# Altium PCB Ser_plytka.pcbdoc
Units mm, origin at the board's own origin, x right, y up, seen from the top; angles counter-clockwise.
Board outline 91 x 25 mm, 2 copper layers (Top Layer, Bottom Layer); 99 components, 82 nets, 372 pads, 273 vias.
Unrouted connection lines stored in the file: 66.
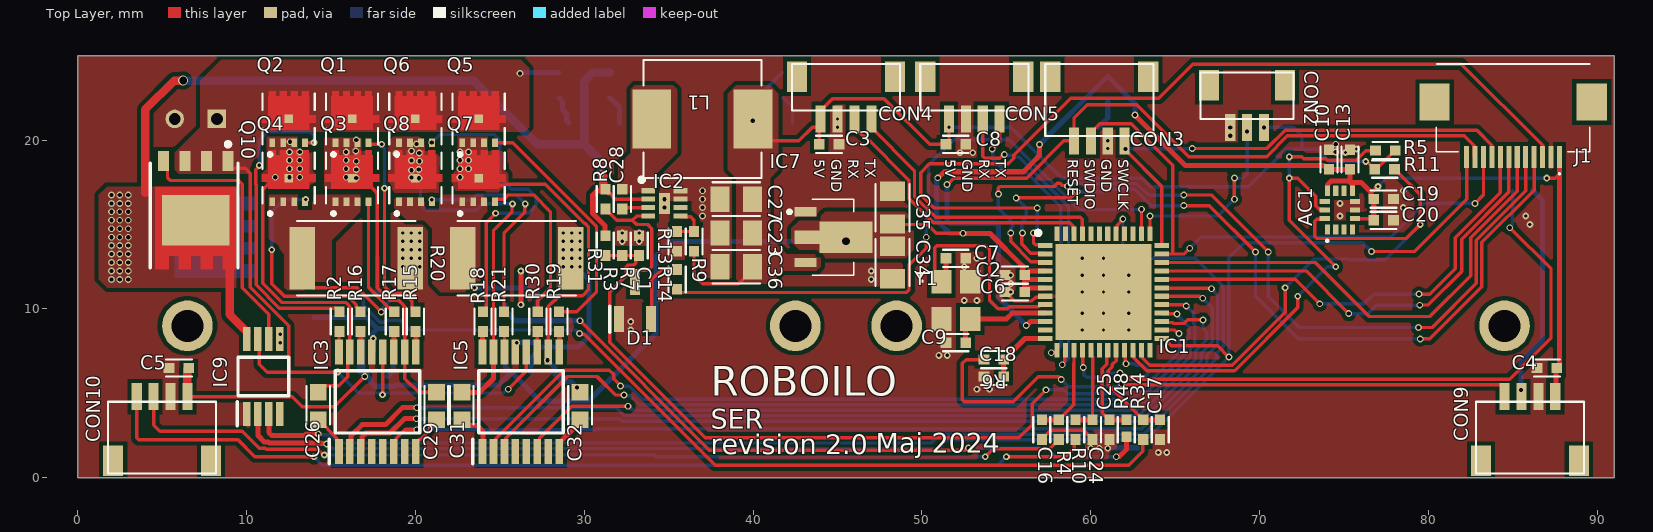
[diagram p0: Top Layer view]
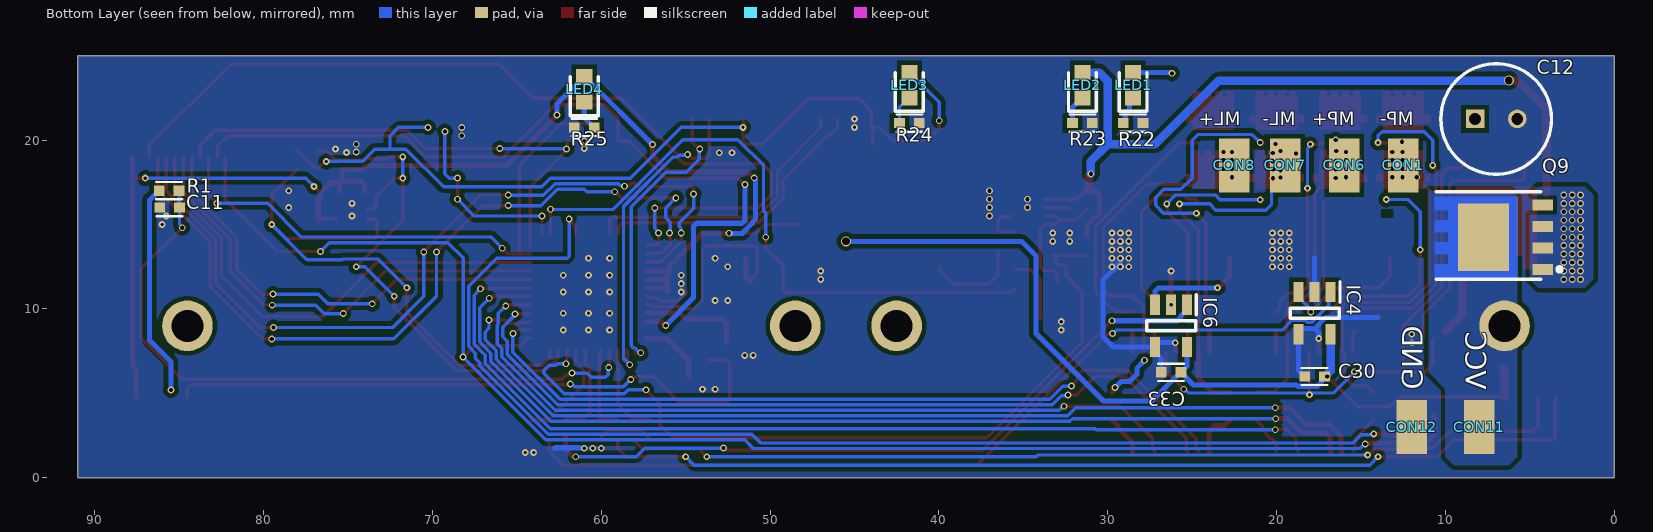
[diagram p1: Bottom Layer view, seen from below]
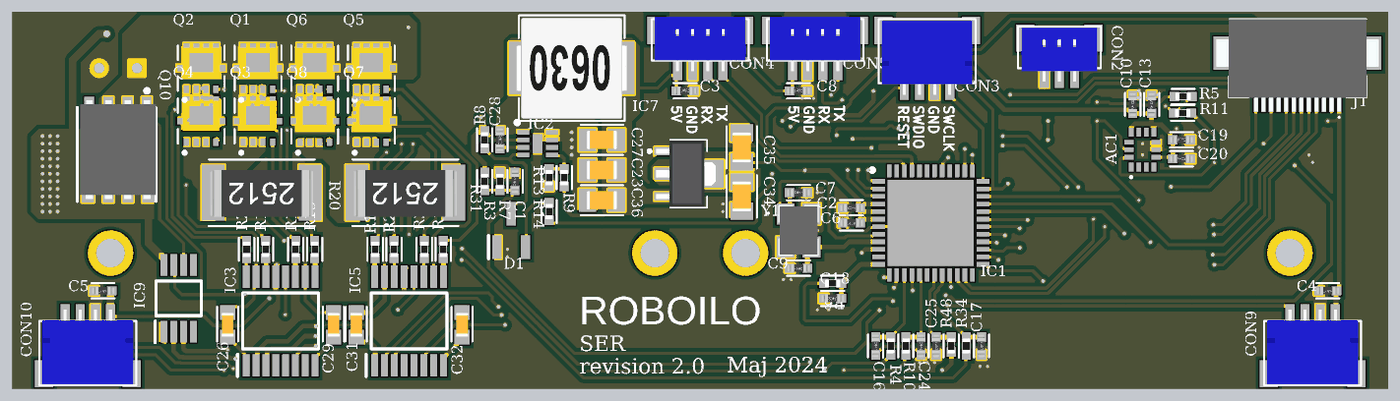
[diagram p2: 3D render of the assembled board from above, using the file's embedded part models]
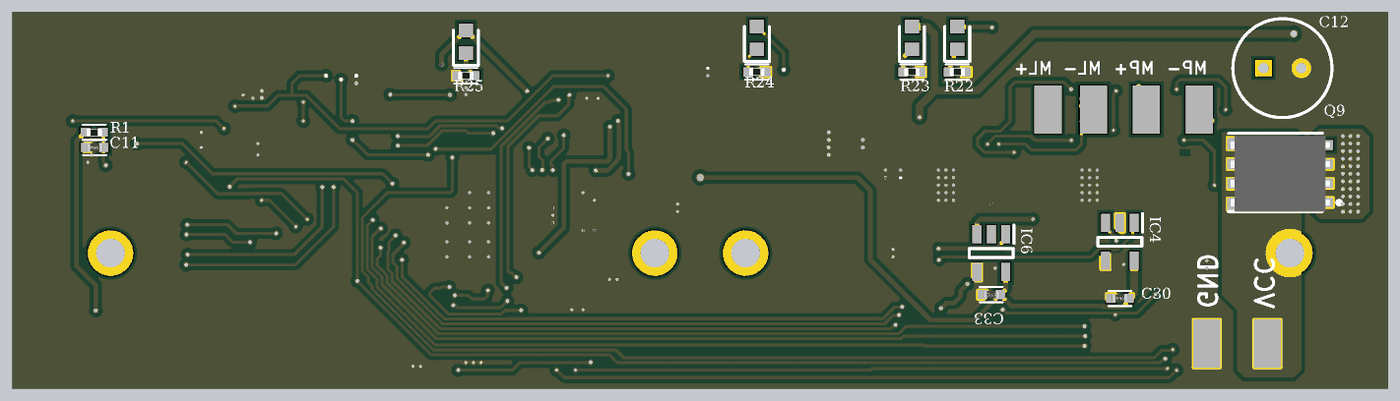
[diagram p3: 3D render of the assembled board from below, using the file's embedded part models]

## Layer stack, top to bottom
Top Solder: solder mask 0.0102, Solder Resist, Dk 3.5
Top Layer: signal copper 0.0356
Dielectric 1: dielectric 0.32, FR-4, Dk 4.8
Bottom Layer: signal copper 0.0356
Bottom Solder: solder mask 0.0102, Solder Resist, Dk 3.5

## Board outline
0,0 91,0 91,25 0,25

## Design rules (kind name [scope] priority, off if disabled: settings)
Clearance [All] p1: gap=0.254 ignorepadtopadclearanceinfootprint=TRUE except(0.127: Arc-Arc Arc-Track Arc-SMDPad Arc-Via Arc-Text Track-Track Track-SMDPad Track-Via Track-Text SMDPad-SMDPad SMDPad-Via SMDPad-Text THPad-Via THPad-Text Via-Via Via-Text Fill-Text Poly-Text Region-Text Text-Text; 0.2: Arc-THPad Track-THPad SMDPad-THPad; 0.5: THPad-THPad)
HoleSize [All] p1: absolutevalues=TRUE maxlimit=2.54 minlimit=0.02 maxpercent=80.000 minpercent=20.000
HoleToHoleClearance [All] p1: gap=0.127 allowstackedmicrovias=TRUE
PlaneClearance [All] p1: clearance=0.3
PlaneConnect PlaneConnect_1 [(HasFootprint('R 2512'))] p1: planeconnectstyle=Relief reliefexpansion=0.508 reliefentries=4 reliefconductorwidth=0.254 reliefairgap=0.254
PlaneConnect [All] p2: planeconnectstyle=Relief reliefexpansion=0.508 reliefentries=4 reliefconductorwidth=0.254 reliefairgap=0.254
PolygonConnect "Polygon Power Connection" [(HasFootprint('DFN 5x6')) OR (HasFootprint('R 2512')) OR IsVia OR HasFootprint('SMD PAD')] p1: connectstyle=Direct reliefconductorwidth=0.254 reliefentries=4 polygonreliefangle="90 Angle" airgapwidth=0.254 // Conection to high power components
PolygonConnect [All] p2: connectstyle=Direct reliefconductorwidth=0.254 reliefentries=4 polygonreliefangle="90 Angle" airgapwidth=0.254
RoutingVias [All] p1: holewidth=0.3 width=0.5 viastyle="Through Hole" minholewidth=0.2 minwidth=0.3 maxholewidth=1 maxwidth=1.27
SilkToSilkClearance [All] p1: silktosilkclearance=0.127
SolderMaskExpansion TentedVias [IsVia] p1: expansion=0.102 istentingtop=TRUE
SolderMaskExpansion [All] p2: expansion=0.102 istentingtop=FALSE
Width [All] p1: maxlimit=0.508 minlimit=0.127 preferedwidth=0.3
25 further rules are at their usual default settings.

## Classes and differential pairs
component class MCU-and-ICs: AC1 C1 C2 C6 C7 C9 C10 C13 C19 C20 C23 C27 C28 CON2 CON3 D1 IC1 IC2 J1 L1 R3 R5 R7 R8 R9 R11 R13 R14 Y1
component class Interface1: +12 C12 C34 C35 C36 CON11 CON12 GND IC7 IC9 LED1 LED2 LED3 LED4 Q9 Q10 R22 R23 R24 R25
component class Connectors-and-Filters: C3 C4 C5 C8 C11 C16 C17 C18 C24 C25 CON4 CON5 CON9 CON10 R1 R4 R6 R10 R34 R48
component class Channel-B2: C31 C32 C33 CON7 CON8 IC5 IC6 Q5 Q6 Q7 Q8 R18 R19 R21 R30 R31 V1B
component class Channel-A2: AHS C26 C29 C30 CON1 CON6 IC3 IC4 Q1 Q2 Q3 Q4 R2 R15 R16 R17 R20 V1A

## Components (designator, comment, footprint, x,y, rotation, side; value= is the part's Value field where it differs from the comment)
AC1 "LSM6DSOXTR" LGA-14_1 74.75,15.85 r90 top
C1 "1uF" "C 0402" 33.25,13.75 r90 top
C2 "1uF" "C 0402" 55.5,12 r180 top
C3 "100nF" "C 0402" 44.5,19.75 r0 top
C4 "100nF" "C 0402" 87,6.5 r180 top
C5 "100nF" "C 0402" 6,6.5 r180 top
C6 "100nF" "C 0402" 55.5,11 r180 top
C7 "22pF" "C 0402" 52,13 r0 top
C8 "100nF" "C 0402" 52,19.75 r0 top
C9 "22pF" "C 0402" 52,8 r180 top
C10 "100nF" "C 0402" 74.1,18.85 r90 top
C11 "22nF" "C 0402" 85.55,16 r0 bottom
C12 "UVY1V101MED1TD" CAPPRD250W50D655H1250 8.25,21.25 r180 bottom
C13 "1uF" "C 0402" 75.35,18.85 r90 top
C16 "22nF" "C 0402" 57.1,2.847 r270 top
C17 "22nF" "C 0402" 64.1,2.847 r270 top
C18 "22nF" "C 0402" 54.25,6 r180 top
C19 "1uF" "C 0402" 77.334,16.5 r0 top
C20 "100nF" "C 0402" 77.334,15.25 r0 top
C23 "22uF" "C 0805" 39,14.5 r180 top
C24 "22nF" "C 0402" 60.1,2.847 r270 top
C25 "22nF" "C 0402" 61.1,2.847 r270 top
C26 "1uF" "C 0603" 14.25,4.25 r90 top
C27 "22uF" "C 0805" 39,16.5 r180 top
C28 "100nF" "C 0402" 32.25,16.5 r270 top
C29 "1uF" "C 0603" 21.25,4.25 r90 top
C30 "100nF" "C 0402" 17.75,6 r0 bottom
C31 "1uF" "C 0603" 22.75,4.25 r90 top
C32 "1uF" "C 0603" 29.75,4.25 r90 top
C33 "100nF" "C 0402" 26.25,6.25 r0 bottom
C34 "10uF" "C 0805" 48.25,12.75 r270 top
C35 "10uF" "C 0805" 48.25,16 r90 top
C36 "10uF" "C 0805" 39,12.5 r180 top
CON1 "1 Pin" "SMD PAD" 12.5,18.5 r180 bottom
CON2 "3 Pin" BM03B-SRSS-TB 69.25,22.25 r0 top
CON3 "4 PIN" SM04B-SRSS-TB 60.5,22.75 r0 top
CON4 "4 PIN" BM04B-SRSS-TB 45.5,22.75 r0 top
CON5 "4 PIN" BM04B-SRSS-TB 53.1,22.75 r0 top
CON6 "1 Pin" "SMD PAD" 16,18.5 r0 bottom
CON7 "1 Pin" "SMD PAD" 19.5,18.5 r0 bottom
CON8 "1 Pin" "SMD PAD" 22.5,18.5 r0 bottom
CON9 "4 PIN" SM04B-SRSS-TB 86,2.002 r180 top
CON10 "4 PIN" SM04B-SRSS-TB 5,2.002 r180 top
CON11 "Battery" "SMD PAD" 8,3 r180 bottom
CON12 "GND" "SMD PAD" 12,3 r180 bottom
D1 "P0102AL_5AA4" SOT95P255X140-3N 33,10.5 r90 top
IC1 "STM32G061C6U6" QFN50P700X700X65-49N-D 60.75,11 r0 top
IC2 "RT7251AZQW" SON50P200X200X80-9N-D 34.75,16.25 r0 top
IC3 "MIC4606-2YTS-TR" SOP65P640X120-16N 17.75,4.5 r90 top
IC4 "INA180A2IDBVR" SOT95P280X145-5N 17.75,9.75 r270 bottom
IC5 "MIC4606-2YTS-TR" SOP65P640X120-16N 26.25,4.5 r90 top
IC6 "INA180A2IDBVR" SOT95P280X145-5N 26.25,9 r270 bottom
IC7 "AZ1117CR-3.3TRG1" AZ1117CR33TRG1 45.95,14.25 r270 top
IC9 "MAX1614EUA+" SOP65P490X110-8N 11,6 r90 top
J1 "XF3M-1215-1B" XF3M12151B 85,21.75 r180 top
L1 "22uH" HPI0630 37,21.25 r180 top
LED1 "Green" LEDC1608X50N 28.5,23.25 r90 bottom
LED2 "RED" LEDC1608X50N 31.5,23.25 r90 bottom
LED3 "Green" LEDC1608X50N 41.75,23.25 r90 bottom
LED4 "Green" LEDC1608X50N 61,23 r90 bottom
Q1 "Model?" "DFN 3X3" 16.25,21.25 r90 top
Q2 "Model?" "DFN 3X3" 12.5,21.25 r90 top
Q3 "Model?" "DFN 3X3" 16.25,17.75 r90 top
Q4 "Model?" "DFN 3X3" 12.5,17.75 r90 top
Q5 "Model?" "DFN 3X3" 23.75,21.25 r90 top
Q6 "Model?" "DFN 3X3" 20,21.25 r90 top
Q7 "Model?" "DFN 3X3" 23.75,17.75 r90 top
Q8 "Model?" "DFN 3X3" 20,17.75 r90 top
Q9 "AON6403" "DFN 5x6" 7.15,14.25 r90 bottom
Q10 "Model?" "DFN 5x6" 7,15.85 r180 top
R1 "8k" "R 0402"#1 85.584,17 r0 bottom
R2 "2.2R" "R 0402"#1 15.5,9.25 r90 top
R3 "47k" "R 0402"#1 31.25,13.75 r90 top
R4 "8k" "R 0402"#1 58.1,2.847 r270 top
R5 "3k" "R 0402"#1 77.434,19.375 r0 top
R6 "8k" "R 0402"#1 54.25,7 r180 top
R7 "13k" "R 0402"#1 32.25,13.75 r270 top
R8 "63k" "R 0402"#1 31.25,16.5 r90 top
R9 "120k" "R 0402"#1 36.5,14 r270 top
R10 "8k" "R 0402"#1 59.1,2.847 r270 top
R11 "3k" "R 0402"#1 77.4,18.275 r180 top
R13 "22k" "R 0402"#1 35.5,14 r90 top
R14 "1k" "R 0402"#1 35.5,11.75 r270 top
R15 "2.2R" "R 0402"#1 20,9.25 r90 top
R16 "2.2R" "R 0402"#1 16.75,9.25 r90 top
R17 "2.2R" "R 0402"#1 18.75,9.25 r90 top
R18 "2.2R" "R 0402"#1 24,9.25 r90 top
R19 "2.2R" "R 0402"#1 28.5,9.25 r90 top
R20 "20mR" "R 2512" 16.5,13 r180 top
R21 "2.2R" "R 0402"#1 25.25,9.25 r90 top
R22 "2k" "R 0402"#1 28.5,21 r180 bottom
R23 "2k" "R 0402"#1 31.5,21 r180 bottom
R24 "500R" "R 0402"#1 41.75,21 r180 bottom
R25 "160R" "R 0402"#1 61,20.75 r0 bottom
R30 "2.2R" "R 0402"#1 27.25,9.25 r90 top
R31 "20mR" "R 2512" 26,13 r180 top
R34 "8k" "R 0402"#1 63.1,2.847 r270 top
R48 "8k" "R 0402"#2 62.1,2.847 r270 top
Y1 "MCSJK-7U-16.00-12-30-80-B-30" MCSJK7U1600123080B30 52,10.5 r270 top

## Footprints (in the part's own frame and the unit in brackets; to place one, negate y for a bottom-side part, rotate by r counter-clockwise, add the part's x,y. Pads: shape width x height; smd on the part's side, far side on the other; paste and mask are expansions set on the pad)
AZ1117CR33TRG1 [mm]
  rect 0.55x1.3 smd: 1(-1.5,-2.838) 3(1.5,-2.838)
  rect 0.8x1.475 smd: 2(0,-2.75)
  rect 1.85x3.125 smd: 4(0,-0.45)
  silkscreen extent -2.25,-3.9 2.25,0, body extent -2.2,-3.37 2.2,0.58, height 1.4
BM03B-SRSS-TB [mm]
  rect 0.6x1.6 smd: 1(-1,-1.5) 2(0,-1.5) 3(1,-1.5)
  rect 1.2x1.8 smd: A(-2.25,1) B(2.25,1)
  silkscreen extent -2.75,-1 2.75,1.75, body extent -2.5,-1.9 2.5,1.7, height 4.25
BM04B-SRSS-TB [mm]
  rect 0.6x1.6 smd: 1(-1.5,-1.5) 2(-0.5,-1.5) 3(0.5,-1.5) 4(1.5,-1.5)
  rect 1.2x1.8 smd: A(-2.9,1) B(2.9,1)
  silkscreen extent -3.2,-1 3.2,1.75, body extent -3,-1.7 3,1.9, height 4.25
"C 0402" [mm] "MLCC Capacitor 0402"
  rect 0.635x0.6 smd: 1(-0.584,0) 2(0.584,0)
  silkscreen extent -0.76,-0.51 0.76,0.51, body extent -0.76,-0.25 0.74,0.25, height 0.35
"C 0603" [mil]
  rect 38x39.37 smd: 1(-32,0) 2(32,0)
  silkscreen extent -43,-28 47,28, body extent -31,-16 31,16, height 24
"C 0805" [mil]
  rect 45x59.06 smd: 1(-38,0) 2(38,0)
  silkscreen extent -55,-39 55,39, body extent -39,-25 39,25, height 49
CAPPRD250W50D655H1250 [mm]
  rect 1.1x1.1 hole 0.7: 1(0,0)
  round 1.1 hole 0.7: 2(2.5,0)
  silkscreen extent -2.02,-3.27 4.52,3.27, body extent -2.15,-3.4 4.65,3.4, height 12.5
"DFN 3X3" [mm] "AON 7xxx Series Mosfets"
  rect 0.5x0.35 smd: 1(-1.4,0.975) 2(-1.4,0.325) 3(-1.4,-0.325) 4(-1.4,-0.975)
  rect 0.5x0.5 smd paste-1 mask+0: 5_8(0,0)
  Top Layer region: 0.215,1.225 1.35,1.225 1.35,1.175 1.65,1.175 1.65,0.775 1.35,0.775 1.35,0.525 1.65,0.525 1.65,0.125 1.35,0.125 1.35,-0.125 1.65,-0.125 1.65,-0.525 1.35,-0.525 1.35,-0.775 1.65,-0.775 1.65,-1.175 1.35,-1.175 1.35,-1.225 0.215,-1.225 0.215,-1.605 -0.215,-1.605 -0.215,-1.225 -0.63,-1.225 -0.63,1.225 -0.215,1.225 -0.215,1.605 0.215,1.605
  silkscreen extent -2.2,-1.55 1.5,1.55
"DFN 5x6" [mm] "PowerMOSFET"
  rect 0.65x1.2 smd: 1(-1.905,-2.91) 2(-0.635,-2.91) 3(0.635,-2.91) 4(1.905,-2.91)
  rect 4x3 smd: 5_8(0,0.6)
  Top Layer region: -2.4,-1.4 -2.4,3.5 -1.6,3.5 -1.6,2.7 -1,2.7 -1,3.5 -0.3,3.5 -0.3,2.7 0.3,2.7 0.3,3.5 1,3.5 1,2.7 1.6,2.7 1.6,3.5 2.4,3.5 2.4,-1.4
  silkscreen extent -2.5,-4.02 2.7,3.42, body extent -2.5,-3.27 2.5,3.26, height 1.2
HPI0630 [mm] "Power Inductor"
  rect 2.3x3.5 smd: 1(-3,0) 2(3,0)
  silkscreen extent -3.5,-3.5 3.5,3.5, body extent -3.65,-3.35 3.65,3.35, height 2.81
LEDC1608X50N [mm]
  rect 0.9x0.95 smd: 1(-0.75,0) 2(0.75,0)
  silkscreen extent -1.55,-0.82 0.75,0.82, body extent -0.8,-0.4 0.8,0.4, height 0.4
LGA-14_1 [mm]
  rect 0.6x0.3 smd: 1(-1.15,0.75) 2(-1.15,0.25) 3(-1.15,-0.25) 4(-1.15,-0.75) 8(1.15,-0.75) 9(1.15,-0.25) 10(1.15,0.25) 11(1.15,0.75)
  rect 0.3x0.6 smd: 5(-0.5,-0.9) 6(0,-0.9) 7(0.5,-0.9) 12(0.5,0.9) 13(0,0.9) 14(-0.5,0.9)
  silkscreen extent -1.83,0.74 -1.8,0.77, body extent -1.62,-1.25 1.38,1.25, height 0.86
MCSJK7U1600123080B30 [mm]
  rect 1.4x1.2 smd: 1(-1.1,-0.85) 2(1.1,-0.85) 3(1.1,0.85) 4(-1.1,0.85)
  silkscreen extent -1.2,-2.05 -1.1,-1.95, body extent -1.68,-1.33 1.68,1.33, height 0.9
QFN50P700X700X65-49N-D [mm]
  rect 0.85x0.3 smd: 1(-3.45,2.75) 2(-3.45,2.25) 3(-3.45,1.75) 4(-3.45,1.25) 5(-3.45,0.75) 6(-3.45,0.25) 7(-3.45,-0.25) 8(-3.45,-0.75) 9(-3.45,-1.25) 10(-3.45,-1.75) 11(-3.45,-2.25) 12(-3.45,-2.75) 25(3.45,-2.75) 26(3.45,-2.25) 27(3.45,-1.75) 28(3.45,-1.25) 29(3.45,-0.75) 30(3.45,-0.25) 31(3.45,0.25) 32(3.45,0.75) 33(3.45,1.25) 34(3.45,1.75) 35(3.45,2.25) 36(3.45,2.75)
  rect 0.3x0.85 smd: 13(-2.75,-3.45) 14(-2.25,-3.45) 15(-1.75,-3.45) 16(-1.25,-3.45) 17(-0.75,-3.45) 18(-0.25,-3.45) 19(0.25,-3.45) 20(0.75,-3.45) 21(1.25,-3.45) 22(1.75,-3.45) 23(2.25,-3.45) 24(2.75,-3.45) 37(2.75,3.45) 38(2.25,3.45) 39(1.75,3.45) 40(1.25,3.45) 41(0.75,3.45) 42(0.25,3.45) 43(-0.25,3.45) 44(-0.75,3.45) 45(-1.25,3.45) 46(-1.75,3.45) 47(-2.25,3.45) 48(-2.75,3.45)
  rect 5.7x5.7 smd: 49(0,0)
  silkscreen extent -4,3.38 -3.75,3.62, body extent -3.55,-3.55 3.55,3.55, height 0.65
"R 0402"#1 [mm] "0402 resistor Chip"
  rect 0.635x0.6 smd: 1(-0.584,0) 2(0.584,0)
  silkscreen extent -0.76,-0.51 0.76,0.51, body extent -0.5,-0.25 0.5,0.25, height 0.31
"R 0402"#2 [mm] "0402 resistor Chip"
  rect 0.635x0.6 smd: 1(-0.584,0) 2(0.412,0)
  silkscreen extent -0.76,-0.51 0.76,0.51, body extent -0.5,-0.25 0.5,0.25, height 0.31
"R 2512" [mm]
  rect 1.5x3.7 smd: 1(-3.2,0) 2(3.2,0)
  silkscreen extent -3.5,-2.2 3.5,2.2, body extent -3.4,-1.5 3.4,1.6, height 0.6
SM04B-SRSS-TB [mm]
  rect 0.6x1.6 smd: 1(-1.5,-2.8) 2(-0.5,-2.8) 3(0.5,-2.8) 4(1.5,-2.8)
  rect 1.2x1.8 smd: A(-2.9,1) B(2.9,1)
  silkscreen extent -3.2,-2.5 3.2,1.75, body extent -3,-3.25 3,1.7, height 2.96
"SMD PAD" [mm]
  rect 1.8x3.2 smd: 1(0,0)
SON50P200X200X80-9N-D [mm]
  rect 0.8x0.3 smd: 1(-0.95,0.75) 2(-0.95,0.25) 3(-0.95,-0.25) 4(-0.95,-0.75) 5(0.95,-0.75) 6(0.95,-0.25) 7(0.95,0.25) 8(0.95,0.75)
  rect 0.65x1.25 smd: 9(0,0)
  silkscreen extent -1.47,1.28 -1.22,1.52, body extent -1.05,-1 1.05,1, height 0.8
SOP65P490X110-8N [mm]
  rect 1.425x0.45 smd: 1(-2.212,0.975) 2(-2.212,0.325) 3(-2.212,-0.325) 4(-2.212,-0.975) 5(2.212,-0.975) 6(2.212,-0.325) 7(2.212,0.325) 8(2.212,0.975)
  silkscreen extent -2.93,-1.5 1.15,1.55, body extent -2.45,-1.5 2.45,1.5, height 1.1
SOP65P640X120-16N [mm]
  rect 1.475x0.45 smd: 1(-2.938,2.275) 2(-2.938,1.625) 3(-2.938,0.975) 4(-2.938,0.325) 5(-2.938,-0.325) 6(-2.938,-0.975) 7(-2.938,-1.625) 8(-2.938,-2.275) 9(2.938,-2.275) 10(2.938,-1.625) 11(2.938,-0.975) 12(2.938,-0.325) 13(2.938,0.325) 14(2.938,0.975) 15(2.938,1.625) 16(2.938,2.275)
  silkscreen extent -3.67,-2.5 1.85,2.85, body extent -3.2,-2.5 3.2,2.5, height 1.2
SOT95P255X140-3N [mm]
  rect 1.55x0.6 smd: 1(-1.1,0.95) 2(-1.1,-0.95) 3(1.1,0)
  silkscreen extent -1.88,1.5 -0.33,1.5
SOT95P280X145-5N [mm]
  rect 1.2x0.6 smd: 1(-1.25,0.95) 2(-1.25,0) 3(-1.25,-0.95) 4(1.25,-0.95) 5(1.25,0.95)
  silkscreen extent -1.85,-1.45 0.3,1.5, body extent -1.4,-1.45 1.4,1.45, height 1.2
XF3M12151B [mm]
  rect 0.3x1.3 smd: 1(-2.75,2.75) 2(-2.25,2.75) 3(-1.75,2.75) 4(-1.25,2.75) 5(-0.75,2.75) 6(-0.25,2.75) 7(0.25,2.75) 8(0.75,2.75) 9(1.25,2.75) 10(1.75,2.75) 11(2.25,2.75) 12(2.75,2.75)
  rect 1.8x2.2 smd: MP1(-4.65,-0.5) MP2(4.65,-0.5)
  silkscreen extent -4.55,-2.75 4.55,3.8, body extent -5.37,-2.75 5.37,3.37, height 2.1

## Part data
AC1: "Accelerometer", Manufacturer_Name=STMicroelectronics, Mouser Part Number=511-LSM6DSOXTR, Arrow Part Number=LSM6DSOXTR, Arrow Price/Stock=https://www.arrow.com/en/products/lsm6dsoxtr/stmicroelectronics, Datasheet Link=https://www.st.com/resource/en/datasheet/lsm6dsox.pdf, Manufacturer_Part_Number=LSM6DSOXTR, Mouser Price/Stock=https://www.mouser.co.uk/ProductDetail/STMicroelectronics/LSM6DSOXTR?qs=l7cgNqFNU1i9dcjzItLpVQ%3D%3D
C1 C2 C3 C4 C5 C6 C7 C8 C9 C10 C11 C13 C16 C17 C18 C19 C20 C23 C24 C25 C26 C27 C28 C29 C30 C31 C32 C33 C34 C35 C36: library part Capacitor, "MLCC Capacitor"
C12: "Capacitor Polarised", Manufacturer_Name=Nichicon, Arrow Part Number=UVY1V101MED1TD, Arrow Price/Stock=https://www.arrow.com/en/products/uvy1v101med1td/nichicon, Datasheet Link=http://nichicon-us.com/english/products/pdfs/e-uvy.pdf, Height=12.5mm, Manufacturer_Part_Number=UVY1V101MED1TD
CON11 CON12: library part "1 Pin"
D1: "SCR", Arrow Part Number="P0102AL 5AA4", Manufacturer_Name=STMicroelectronics, Mouser Part Number=511-P0102AL, Arrow Price/Stock=https://www.arrow.com/en/products/p0102al5aa4/stmicroelectronics, Datasheet Link=https://www.st.com/resource/en/datasheet/p0102al.pdf, Height=1.4mm, Manufacturer_Part_Number="P0102AL 5AA4", Mouser Price/Stock=https://www.mouser.co.uk/ProductDetail/STMicroelectronics/P0102AL-5AA4/?qs=PjVWedEN3CRKQvFRu1Tr6Q%3D%3D
IC1: "Integrated Circuit", Manufacturer_Name=STMicroelectronics, Mouser Part Number=511-STM32G061C6U6, Datasheet Link=https://www.st.com/resource/en/datasheet/stm32g061c6.pdf, Height=0.65mm, Manufacturer_Part_Number=STM32G061C6U6, Mouser Price/Stock=https://www.mouser.co.uk/ProductDetail/STMicroelectronics/STM32G061C6U6?qs=CiayqK2gdcKUDq0OUzUqqg%3D%3D
IC2: "Integrated Circuit", Manufacturer_Name=RICHTEK, Datasheet Link=https://componentsearchengine.com/Datasheets/2/RT7251AZQW.pdf, Height=0.8mm, Manufacturer_Part_Number=RT7251AZQW
IC3 IC5: "Integrated Circuit", Manufacturer_Name=Microchip, Mouser Part Number=579-MIC4606-2YTS-TR, Arrow Part Number=MIC4606-2YTS-TR, Arrow Price/Stock=https://www.arrow.com/en/products/mic4606-2yts-tr/microchip-technology?region=nac, Datasheet Link=https://eu.mouser.com/datasheet/2/268/20005604B-1286645.pdf, Height=1.2mm, Manufacturer_Part_Number=MIC4606-2YTS-TR, Mouser Price/Stock=https://www.mouser.co.uk/ProductDetail/Microchip-Technology/MIC4606-2YTS-TR?qs=fxR7EJxuiMGiGNq6G0IdXQ%3D%3D
IC4 IC6: "Integrated Circuit", Manufacturer_Name="Texas Instruments", Mouser Part Number=595-INA180A2IDBVR, Arrow Part Number=INA180A2IDBVR, Arrow Price/Stock=https://www.arrow.com/en/products/ina180a2idbvr/texas-instruments?region=nac, Datasheet Link=http://www.ti.com/lit/ds/symlink/ina180.pdf, Height=1.45mm, Manufacturer_Part_Number=INA180A2IDBVR, Mouser Price/Stock=https://www.mouser.co.uk/ProductDetail/Texas-Instruments/INA180A2IDBVR?qs=5aG0NVq1C4wYcJfa99BoHg%3D%3D
IC7: "Integrated Circuit", Manufacturer_Name="Diodes Inc.", Mouser Part Number=621-AZ1117CR-3.3TRG1, Arrow Part Number=AZ1117CR-3.3TRG1, Arrow Price/Stock=https://www.arrow.com/en/products/az1117cr-3.3trg1/diodes-incorporated?region=nac, Datasheet Link=https://www.diodes.com/assets/Datasheets/AZ1117C.pdf, Height=2mm, Manufacturer_Part_Number=AZ1117CR-3.3TRG1, Mouser Price/Stock=https://www.mouser.co.uk/ProductDetail/Diodes-Incorporated/AZ1117CR-3.3TRG1?qs=FKu9oBikfSlEg7waHw2tMw%3D%3D
IC9: "Integrated Circuit", Manufacturer_Name="Maxim Integrated", Mouser Part Number=700-MAX1614EUA, Datasheet Link=http://datasheets.maximintegrated.com/en/ds/MAX1614.pdf, Height=1.1mm, Manufacturer_Part_Number=MAX1614EUA+, Mouser Price/Stock=https://www.mouser.co.uk/ProductDetail/Maxim-Integrated/MAX1614EUA%2b?qs=1THa7WoU59FiDBRRbRrFJA%3D%3D
J1: "Connector", Manufacturer_Name="Omron Electronics", Mouser Part Number=653-XF3M-1215-1B, Arrow Part Number=XF3M-1215-1B, Arrow Price/Stock=https://www.arrow.com/en/products/xf3m-1215-1b/omron, Datasheet Link=https://datasheet.lcsc.com/szlcsc/Omron-Electronics-XF3M-1215-1B_C231431.pdf, Height=2mm, Manufacturer_Part_Number=XF3M-1215-1B, Mouser Price/Stock=https://www.mouser.co.uk/ProductDetail/Omron-Electronics/XF3M-1215-1B?qs=1He0yLMpldAQYeSJcjbchQ%3D%3D
L1: library part Inductor, "General pourpouse inductor"
LED1 LED2 LED3 LED4: library part 150060GS55040, "LED", Manufacturer_Name="Wurth Elektronik", Mouser Part Number=710-150060GS55040, Datasheet Link=https://katalog.we-online.de/led/datasheet/150060GS55040.pdf, Height=0.5mm, Manufacturer_Part_Number=150060GS55040, Mouser Price/Stock=https://www.mouser.co.uk/ProductDetail/Wurth-Elektronik/150060GS55040?qs=fAHHVMwC%252Bbhr5Aln2oA6Nw%3D%3D
Q1 Q2 Q3 Q4 Q5 Q6 Q7 Q8 Q10: library part "Power MOSFET", "N-Mosfet DFN 5x6"
Q9: "P-Mosfet 30V 67A Rds(on) 3.1mR"
R1 R2 R3 R4 R5 R6 R7 R8 R9 R10 R11 R13 R14 R15 R16 R17 R18 R19 R20 R21 R22 R23 R24 R25 R30 R31 R34 R48: library part Resistor, "General pourpouse resistor"
Y1: "Crystal or Oscillator", Manufacturer_Name=MULTICOMP, Datasheet Link=https://www.farnell.com/datasheets/2864166.pdf, Height=0.8mm, Manufacturer_Part_Number=MCSJK-7U-16.00-12-30-80-B-30

## Free pads (board coordinates)
  round 3 hole 1.9: 2(6.5,9) 3(42.5,9) 4(84.5,9) 5(48.5,9)

## Via types
v1: diameter 0.4, hole 0.25, Top Layer to Bottom Layer, tented both sides, 155 vias
v2: diameter 0.4, hole 0.2, Top Layer to Bottom Layer, tented both sides, 116 vias
v3: diameter 0.6, hole 0.45, Top Layer to Bottom Layer, tented both sides, 2 vias

## Nets (pads, with @x,y where several pads share a name; then routed paths per layer and width w, separated by ;. In a path a pad name is that pad's centre, name@x,y a point inside that pad or via, vN(x,y) a via of type N, cw(c..) or ccw(c..) an arc to the next point about the centre after c; other vN are vias at no path point)
3.3V: AC1.5 AC1.8 AC1.11 C2.1 C4.1 C5.1 C6.1 C10.1 C13.1 C19.1 C20.1 C30.1 C33.1 C34.1 C35.1 CON9.1 CON10.1 IC1.4 IC1.5 IC1.6 IC4.5 IC6.5 IC7.2 IC7.4 J1.1 LED4.2 | length 135.7
  Top Layer w0.2: CON10.1@6.584,4.8 12.7,4.8 13.3,4.2 15.2,4.2 v1(17,6) ; C35.1 48.285,15 50.313,15 50.834,14.479 v1(52.425,14.479) ; AC1.5 76.65,15.35 C20.1 ; 76.582,16.918 76.625,16.918 76.958,17.25 v2(77,17.25) ; v2(87,17.75) 87.5,17.75 87.75,18
  Top Layer w0.3: v1(50.937,17.762) 50.964,17.762 51.328,18.126 56.005,18.126 56.8,18.921 56.8,18.932 56.95,19.082 56.95,19.725 v1(56.957,19.732) ; v1(52.425,14.479) 52.434,14.47 54.03,14.47 55.965,12.535 55.965,12.119 C2.1 ; IC1.6 56.352,11.25 56.102,11 C6.1 C2.1 ; IC1.5 56.352,11.75 C2.1@56.102,12 ; IC1.4 56.352,12.25 C2.1@56.102,12 ; v1(62.606,21.49) 65.596,18.5 73.774,18.5 73.841,18.433 73.95,18.433 74.1,18.283 C10.1 C13.1 75.35,17.498 ; AC1.11 74,17.342 74.235,17.577 75.271,17.577 75.35,17.498 ; AC1.8 75.5,17.348 75.35,17.498 ; C20.1 C19.1 76.732,16.5 76.582,16.65 76.582,16.918 76.002,17.498 75.35,17.498 ; CON9.1 87.542,4.844 87.542,6.458 C4.1 ; C4.1@87.75,6.65 87.75,18 J1.1 ; C2.1 C2.1@56.102,12
  Top Layer w0.5: CON10.1 6.5,6.433 6.567,6.5 C5.1
  Bottom Layer w0.2: v2(77,17.25) 77.5,17.75 v2(87,17.75)
  Bottom Layer w0.3: v1(17,6) C30.1@17.183,6 ; C30.1@17.092,5.908 17.275,5.908 17.333,5.85 17.333,5.676 17.586,5.423 18.766,5.423 18.843,5.5 24.916,5.5 C33.1 ; IC6.5 25.3,6.598 C33.1@25.698,6.2 ; C33.1@25.733,6.2 27.383,4.55 30.25,4.55 34.25,8.55 34.25,13.15 35.1,14 v3(45.5,14) ; v1(50.937,17.762) 50.937,17.735 50.87,17.668 50.87,15.305 51.048,15.127 51.048,15.074 51.652,14.47 52.416,14.47 v1(52.425,14.479) ; v1(56.957,19.732) 60.975,23.75 61.025,23.75 62.606,22.169 v1(62.606,21.49)
  Bottom Layer w0.5: IC4.5 16.8,6.348 C30.1@17.074,6.074
5V: C3.1 C8.1 C23.1 C27.1 C36.1 CON2.3 CON4.1 CON5.1 IC7.3 L1.1 LED3.2 R5.2 R9.2 R11.2 | length 60.2
  Top Layer w0.2: R9.2 36.5,12 37.007,11.493 39.137,11.493 39.965,12.321 C36.1 ; v1(39.975,21.15) 39.975,20.675 40.7,19.95 42.025,19.95 ; 42.026,19.949 42.699,19.949 43.517,20.767 43.8,20.767 CON4.1@44,20.967 ; C3.1 43.916,20.666 44,20.75 CON4.1@44,20.967 ; CON5.1@51.489,21 51.489,20.861 v2(51.6,20.75) ; CON5.1 v2(51.6,20.75) ; v2(76.272,18.728) 76.31,18.69 76.383,18.69 76.798,18.275 R11.2 77.016,18.475 77.101,18.475 78.001,19.375 R5.2 ; CON4.1@44,20.967 CON4.1 44,21.75 44.7,22.45 47.75,22.45 50.45,19.75 C8.1 51.6,19.934 v2(51.6,20.75)
  Bottom Layer w0.2: v1(39.975,21.15) 39.975,22.25 41.725,24 LED3.2 ; v2(51.6,20.75) 55.262,20.75 58.262,17.75 63,17.75 63.521,17.229 69.333,17.229 71.562,19.458 72.485,19.458 ; v1(70.25,20.75) 72,20.75 72.5,20.25 72.5,19.473 72.485,19.458 ; v2(76.272,18.728) 76.25,18.75 74.116,18.75 73.408,19.458 72.485,19.458
+12: IC2.2 IC9.8 LED2.2 Q9.1 Q9.2 Q9.3 Q10.5_8 R3.2 R8.2 | length 56.4
  Top Layer w0.2: R8.2@31.468,16.867 31.834,16.5 IC2.2
  Top Layer w0.3: v1@31,17.973 v1(31,18) ; R8.2@31.121,17.062 R8.2@31.183,17 ; R3.2 31.231,14.354 31.231,14.926 30.5,15.657 30.5,16.75 30.75,17 R8.2@31.183,17 ; R8.2@31.468,16.867 31.45,16.867 31.25,17.067 R8.2@31.183,17
  Top Layer w0.5: 4,16.866 4,21.8 5.725,23.525 v3(6.25,23.525) ; Q10.5_8 7.5,15.25 9,13.75 9,9.675 IC9.8@10,8.675 ; v1@31,17.973 31.121,17.852 R8.2@31.121,17.062
  Bottom Layer w0.5: v3(6.25,23.525) 23.425,23.525 27.2,19.75 29.95,19.75 ; v1(31,18) 31,18.75 30,19.75 30,23.5 30.5,24 LED2.2
  other v1: 2,11.75 2.5,11.75 3,11.75 2,12.25 2.5,12.25 3,12.25 2,12.75 2.5,12.75 3,12.75 2,13.25 2.5,13.25 3,13.25 2,13.75 2.5,13.75 3,13.75 2,14.25 2.5,14.25 3,14.25 2,14.75 2.5,14.75 3,14.75 2,15.25 2.5,15.25 3,15.25 2,15.75 2.5,15.75 3,15.75 2,16.25 2.5,16.25 3,16.25 2,16.75 2.5,16.75 3,16.75
AHB: C29.1 IC3.8 | length 2.4
  Top Layer w0.2: IC3.8 20.025,2.074 20.241,2.29 20.305,2.29 20.85,2.836 20.85,3.055 21.233,3.437 C29.1
"AHB B": C32.1 IC5.8 | length 2.4
  Top Layer w0.3: IC5.8 28.525,2.075 29.4,2.949 29.4,3.105 29.733,3.437 C32.1
AHO: IC3.9 R15.1 | length 1.2
  Top Layer w0.3: IC3.9 R15.1@20.025,8.673
"AHO B": IC5.9 R19.1 | length 1.2
  Top Layer w0.3: IC5.9 28.525,8.589 R19.1@28.551,8.615
AHS: C29.2 CON6.1 IC3.10 Q1.1 Q1.2 Q1.3 Q3.5_8 | length 14.9
  Top Layer w0.2: 17.226,17.369 17.64,16.955 17.64,16.921 17.75,16.811 17.75,11.25 18.5,10.5 19.023,10.5 19.277,10.246 19.277,10.223 19.394,10.106 19.394,8.371 19.381,8.358 19.381,7.444 IC3.10 19.375,5.875 20.187,5.063 C29.2
  other v1: 16.5,17.75 15.9,17.8 16.5,18.25 15.9,18.3 16.5,18.75 15.9,18.8 15.9,19.3 16.475,19.35 16.5,20
"AHS B": C32.2 CON8.1 IC5.10 Q5.1 Q5.2 Q5.3 Q7.5_8 | length 20
  Top Layer w0.2: Q7.5_8 24.183,17.317 25.275,17.317 25.345,17.387 27.69,17.387 30,15.077 30.044,15.077 30.25,14.871 30.25,11.129 29.899,10.778 28.528,10.778 28.25,10.5 28.227,10.5 27.875,10.148 IC5.10
  Top Layer w0.3: v1(29.578,5.35) 29.578,5.235 C32.2
  Bottom Layer w0.3: v1(27.829,6.962) 27.829,6.944 28.28,6.493 28.28,6.133 28.711,5.702 29.199,5.702 29.551,5.35 v1(29.578,5.35)
  other v1: 22.65,17.8 22.65,18.3 23.15,18.3 22.65,18.8 23.15,18.8 22.65,19.3 23.15,19.3
ALO: IC3.11 R17.1 | length 1.2
  Top Layer w0.3: IC3.11 18.727,7.44 R17.1@18.727,8.625
"ALO B": IC5.11 R30.1 | length 1.2
  Top Layer w0.2: IC5.11 27.225,8.539 R30.1@27.301,8.615
"Analog 2": C18.1 IC1.12 R6.1 | length 4
  Top Layer w0.3: C18.1 R6.1 54.852,7 56.102,8.25 IC1.12
"Analog 4": C16.1 IC1.15 R4.1 | length 5.5
  Top Layer w0.2: R4.1 58.1,3.449 58.3,3.649 58.318,3.649 58.995,4.326 58.995,6.755 59,6.76 IC1.15
  Top Layer w0.3: C16.1 R4.1
"Analog 6": C11.1 IC1.16 R1.1 | length 40.3
  Top Layer w0.2: IC1.16 59.525,7.525 59.525,6.55 v1(59.55,6.525) ; v1(61.725,6.2) 61.818,6.107 62.052,6.107 62.331,5.829 84.791,5.829 87.25,8.287 87.25,12.375 v1(84.811,14.814)
  Bottom Layer w0.2: v1(59.55,6.525) 59.588,6.487 59.588,6.112 59.745,5.955 60.585,5.955 60.83,6.2 v1(61.725,6.2) ; v1(84.811,14.814) 84.811,14.868 84.966,15.023 C11.1 84.983,16.017 84.983,16.983 R1.1
"Analog 8": C24.1 IC1.17 R10.1 | length 5.1
  Top Layer w0.2: IC1.17 60.05,7.5 60.05,7.225 60.105,7.17 60.105,5.204 60.1,5.199 C24.1@60.1,3.449
  Top Layer w0.3: R10.1 60,3.431 C24.1
"Analog 10": C17.1 IC1.20 R34.1 | length 6.2
  Top Layer w0.2: IC1.20 61.5,6.935 61.277,6.712 61.277,6.59 61.025,6.338 61.025,5.506 62.883,3.649 62.9,3.649 63.1,3.449 R34.1
  Top Layer w0.3: R34.1 C17.1
"Analog 12": C25.1 IC1.19 R48.1 | length 5.4
  Top Layer w0.2: IC1.19 60.95,7.5 60.95,6.725 60.675,6.45 60.675,3.856 60.882,3.649 60.9,3.649 61.1,3.449 C25.1
  Top Layer w0.3: C25.1 R48.1
"Battery Voltage": C1.1 IC1.21 R3.1 R7.2 | length 47.3
  Top Layer w0.2: R3.1 R7.2 C1.1 33.055,12.971 33.055,12.719 32.938,12.602 32.606,12.602 32.473,12.469 32.473,11.973 31.5,11 31.5,8.025 37.161,2.364 55.739,2.364 56.528,3.153 56.528,4.386 v1(57.35,5.208) ; IC1.21 62.047,7.503 62.047,6.793 v1(62.085,6.755)
  Bottom Layer w0.2: v1(57.35,5.208) 58.405,5.208 58.638,4.975 62.175,4.975 63.392,6.192 63.392,6.358 63.075,6.675 62.685,6.675 62.605,6.755 v1(62.085,6.755)
"Current A": IC4.1 R34.2 | length 52.1
  Top Layer w0.2: v1(29.72,8.545) 29.756,8.509 29.991,8.509 37.758,0.742 62.242,0.742 63.075,1.575 63.075,2.238 R34.2
  Bottom Layer w0.2: IC4.1 16.908,10.892 16.908,10.217 17.906,9.219 18.198,9.219 18.306,9.327 19.094,9.327 19.671,8.75 29.503,8.75 29.708,8.545 v1(29.72,8.545)
"Current B": IC6.1 R48.2 | length 41.8
  Top Layer w0.2: v1(29.745,9.3) 29.75,9.3 37.413,1.637 52.562,1.637 52.696,1.771 v1(52.75,1.771)
  Top Layer w0.3: v1(61.5,1.25) 61.519,1.269 61.702,1.269 62.1,1.667 R48.2
  Bottom Layer w0.2: v1(52.75,1.771) 52.771,1.75 57.429,1.75 57.929,1.25 v1(61.5,1.25)
  Bottom Layer w0.3: IC6.1 25.3,9.95 25.673,9.577 25.673,9.535 25.908,9.3 v1@29.718,9.3
"Enable A": IC1.27 IC3.2 | length 58.5
  Top Layer w0.2: IC1.27 64.25,9.2 64.81,9.2 64.87,9.14 65.536,9.14 65.746,9.35 v1(66.639,9.35)
  Top Layer w0.3: IC3.2 16.2,1.637 16.2,2.5 16.85,3.15 18.225,3.15 19.229,4.154 v1(20.08,4.154)
  Bottom Layer w0.2: v1(20.08,4.154) 31.893,4.154 32.38,3.667 62.842,3.667 66.206,7.031 66.206,7.523 66.867,8.184 66.867,8.626 66.643,8.85 66.643,9.346 v1(66.639,9.35)
"Enable B": IC1.26 IC5.2 | length 47.2
  Top Layer w0.2: IC5.2 24.75,1.687 24.75,2.321 28.806,6.377 31.486,6.377 31.736,6.126 31.736,5.858 v1(32.153,5.441) ; IC1.26 64.971,8.75 65.171,8.55 v1(65.225,8.55)
  Bottom Layer w0.2: v1(32.153,5.441) 32.168,5.426 32.653,5.426 33.426,4.653 58.285,4.653 58.29,4.648 62.436,4.648 65.225,7.437 v1(65.225,8.55)
GND: AC1.6 AC1.7 C1.2 C2.2 C3.2 C4.2 C5.2 C6.2 C7.2 C8.2 C9.2 C10.2 C11.2 C12.2 C13.2 C16.2 C17.2 C18.2 C19.2 C20.2 C23.2 C24.2 C25.2 C27.2 C30.2 C33.2 C34.2 C35.2 C36.2 CON2.1 CON3.3 CON4.2 CON5.2 CON9.2 CON10.2 CON12.1 D1.1 IC1.7 IC1.49 IC2.7 IC2.8 IC2.9 IC3.13 IC4.2 IC4.4 IC5.13 IC6.2 IC6.4 IC7.1 IC9.1 IC9.5 J1.2 Q9.4 R7.1 R13.1 R20.1 R22.2 R23.2 R24.2 R25.2 R31.1 Y1.2 Y1.4 | length 33.4
  Top Layer w0.2: C6.2 54.933,11 55.46,10.473 56.496,10.473 56.723,10.7 57.25,10.7 IC1.7 ; C16.2 57.1,2.28 57.627,2.807 59.573,2.807 60.1,2.28 C24.2
  Top Layer w0.3: IC3.13 17.481,7.494 17.481,8.231 v2(17.5,8.25) ; IC5.13 25.996,7.509 v2(25.996,8) ; v2(26.25,10.25) v2(26.25,12.25)
  Bottom Layer w0.3: 14,9.5 17.092,9.5 17.75,8.842 ; v2(17.5,8.25) 17.5,8.592 17.75,8.842 ; IC4.2 17.75,13 ; C30.2 18.352,6 18.502,6.15 18.502,6.167 18.7,6.366 IC4.4@18.7,8.4 ; IC4.4@18.55,8.746 18.7,8.596 IC4.4 18.7,8.692 18.55,8.842 17.75,8.842 ; v2(25.996,8) 27.05,8 27.2,7.85 IC6.4 ; C33.2 26.834,7.084 27.2,7.45 IC6.4 ; 29.25,12.75 30.274,11.726 30.274,8.351 29.673,7.75 IC6.4 ; v2(61,1.75) 61.019,1.769 61.271,1.769 61.281,1.779 62.721,1.779 62.75,1.75
  other v1: 37,15.5 34.75,16 37,16 34.75,16.5 37,16.5 37,17 74.5,19.289 74.5,19.75 68.25,20.25 68.25,20.75
  other v2: 64,1.5 64.5,1.5 60,1.75 60.5,1.75 53.25,5.25 54,5.25 51,7.25 51.5,7.25 12,8 12,8.5 32.75,8.75 59.5,8.75 60.75,8.75 62.25,8.75 32.75,9.25 59.5,9.75 60.75,9.75 62.25,9.75 52.5,10.5 53.25,10.5 55.25,11 59.5,11 60.75,11 62.25,11 55.25,11.5 47,11.75 55.25,12 59.5,12 60.75,12 62.25,12 47,12.25 19.25,12.5 19.75,12.5 20.25,12.5 28.75,12.5 29.25,12.5 29.75,12.5 52.5,12.5 19.25,13 19.75,13 20.25,13 28.75,13 29.25,13 29.75,13 53.25,13 59.5,13 60.75,13 19.25,13.5 19.75,13.5 20.25,13.5 28.75,13.5 29.25,13.5 29.75,13.5 19.25,14 19.75,14 20.25,14 28.75,14 29.25,14 29.75,14 32.25,14 33.25,14 19.25,14.5 19.75,14.5 20.25,14.5 28.75,14.5 29.25,14.5 29.75,14.5 32.25,14.5 33.25,14.5 86,15 74.75,15.5 85.75,15.5 78.5,16 74.75,16.25 78.5,17 52.25,19.25 53,19.25 75.081,19.264 75.733,19.474 61,19.5 61,19.95 45,20.75 45,21.25
H1A: Q2.4 R2.2 | length 18.8
  Top Layer w0.2: v2(10.75,18.5) 10.75,18.456 10.541,18.247 10.541,17.388 10.577,17.352 10.577,11.423 11.948,10.052 15.3,10.052 15.5,9.852 R2.2 ; Q2.4 v2(13.996,19.85)
  Bottom Layer w0.2: v2(10.75,18.5) 10.75,20 11.25,20.5 13.75,20.5 14,20.25 14,19.854 v2(13.996,19.85)
H1B: Q6.4 R18.2 | length 18.5
  Top Layer w0.2: R18.2 24.2,10.034 24.2,15.116 24.75,15.666 v2(24.75,15.67)
  Bottom Layer w0.2: v1(20.975,19.855) 21.447,20.327 24.673,20.327 25,20 25,17.75 25.673,17.077 26.673,17.077 27.167,16.583 27.167,16.138 26.7,15.67 v2(24.75,15.67)
H2A: Q1.4 R15.2 | length 12
  Top Layer w0.2: Q1.4@17.258,19.83 17.258,19.796 17.3,19.754 17.572,19.754 17.576,19.75 v2(18,19.75) ; v2(18.17,17.141) 18.17,11.33 18.577,10.923 19.327,10.923 19.8,10.45 19.8,10.034 R15.2
  Bottom Layer w0.2: v2(18,19.75) 18,19.696 18.17,19.526 v2(18.17,17.141)
H2B: Q5.4 R19.2 | length 14.7
  Top Layer w0.2: Q5.4 25.773,19.85 30.723,14.9 30.723,11 29.557,9.834 R19.2
"Kill Switch": IC1.25 IC9.2 J1.12 | length 90.1
  Top Layer w0.2: IC1.25 64.458,8.25 64.508,8.2 64.508,8.084 64.767,7.825 67.5,7.825 v1(68.175,7.15) ; v1(76.625,13.4) 79.15,13.4 82.25,16.5 J1.12
  Top Layer w0.3: IC9.2 10.675,2.5 11.048,2.127 11.269,2.127 11.324,2.073 14.371,2.073 14.424,2.019 14.704,2.019 v1@14.723,2
  Bottom Layer w0.2: v1(14.75,2) 14.804,2 15.068,1.736 50.986,1.736 51.5,2.25 63.275,2.25 v1(68.175,7.15) 68.175,13.025 69.08,13.93 76.095,13.93 v1(76.625,13.4)
L1A: Q4.4 R16.2 | length 12.7
  Top Layer w0.2: v2(11.5,13.5) 11.5,11.5 12.25,10.75 15.985,10.75 16.5,10.235 R16.2@16.5,10.084 ; Q4.4@13.488,16.337 Q4.4 13.5,16.375 13.5,16.479 v2(13.504,16.483) ; R16.2 R16.2@16.95,10.034
  Bottom Layer w0.2: v2(11.5,13.5) 11.5,15.75 12.233,16.483 v2(13.504,16.483)
L1B: Q8.4 R21.2 | length 12.9
  Top Layer w0.2: R21.2 25.25,14.5 26.47,15.72 26.47,16.19 v2(26.5,16.22)
  Top Layer w0.3: v2(20.963,16.47) 20.975,16.458 Q8.4
  Bottom Layer w0.2: v2(20.963,16.47) 23.353,16.47 23.634,16.75 25.97,16.75 v2(26.5,16.22)
L2A: Q3.4 R17.2 | length 7.2
  Top Layer w0.2: Q3.4 17.225,11.275 18.448,10.052 18.55,10.052 18.75,9.852 R17.2
L2B: Q7.4 R30.2 | length 10.1
  Top Layer w0.2: Q7.4 24.725,16.425 24.8,16.5 25.25,16.5 25.5,16.75 27,16.75 28,15.75 28,11.25 27.25,10.5 R30.2
"LED 1": IC1.33 J1.7 | length 27.8
  Top Layer w0.2: IC1.33 72.75,12.25 v1(75.275,9.725) ; v1(79.475,10.225) 79.485,10.235 79.975,10.235 81.958,12.218 81.958,14.133 84.75,16.925 J1.7
  Bottom Layer w0.2: v1(75.275,9.725) 76.4,9.725 76.9,10.225 v1(79.475,10.225)
"LED 2": IC1.32 J1.8 | length 26.6
  Top Layer w0.2: IC1.32 72.1,11.75 v1(73.55,10.3) ; v1(79.425,10.878) 80.078,10.878 81.575,12.375 81.575,14.212 84.25,16.887 J1.8
  Bottom Layer w0.2: v1(73.55,10.3) 76.175,10.3 76.753,10.878 v1(79.425,10.878)
"Line LF1": CON10.3 R4.2 | length 56.5
  Top Layer w0.2: CON10.3 4.5,3.125 4.875,2.75 9.75,2.75 10.75,1.75 11.113,1.75 11.168,1.696 14.215,1.696 14.558,1.353 v2(14.612,1.353) ; v2(53.75,1.25) 54.218,1.718 57.573,1.718 58.1,2.245 R4.2
  Bottom Layer w0.2: v2(14.612,1.353) 34.129,1.353 34.232,1.25 v2(53.75,1.25)
"Line LF2": CON10.4 R10.2 | length 59.6
  Top Layer w0.2: CON10.4 3.5,2.372 3.617,2.254 9.496,2.254 10.5,1.25 13.992,1.25 v2(14,1.242) ; v2(55,1.25) 58.5,1.25 59.013,1.763 59.013,2.175 R10.2
  Bottom Layer w0.2: v2(14,1.242) 14.492,0.75 54.5,0.75 v2(55,1.25)
"Line RF1": CON9.3 R1.2 | length 12.6
  Bottom Layer w0.3: v1(85.475,5.2) 85.475,6.875 86.75,8.15 86.75,16.436 86.186,17 R1.2
"Line RF2": CON9.4 R6.2 | length 37.2
  Top Layer w0.2: R6.2 52.617,7 52.392,6.774 52.392,4.617 52.509,4.5 55.4,4.5 56.875,5.975 58.1,5.975 v1(58.25,5.825) ; v1(61.822,5.552) 61.876,5.552 61.927,5.502 84.3,5.502 84.5,5.302 CON9.4
  Bottom Layer w0.2: v1(58.25,5.825) 58.675,5.4 61.575,5.4 61.689,5.514 61.784,5.514 v1(61.822,5.552)
"Low Battery": IC1.41 IC9.3 | length 74.1
  Top Layer w0.2: IC1.41 61.5,14.725 61.55,14.775 61.55,14.968 61.895,15.313 v1(61.895,15.33)
  Top Layer w0.3: IC9.3 11.325,2.675 11.501,2.5 13.45,2.5 13.551,2.601 v2(14.25,2.601)
  Bottom Layer w0.2: v2(14.25,2.601) 14.288,2.562 14.479,2.562 14.503,2.538 14.52,2.555 14.98,2.555 15.472,2.063 50.563,2.063 51.077,2.577 63.14,2.577 67.187,6.624 67.187,6.812 67.45,7.075 67.45,7.38 67.848,7.778 67.848,11.337 66.185,13 62.012,13 61.895,13.117 v1(61.895,15.33)
"Mosfet Kill": IC9.6 Q10.4 | length 15.5
  Top Layer w0.2: Q10.4 5.32,18.534 5.32,17.784 5.5,17.604 9.547,17.604 9.754,17.397 9.754,11.246 11.325,9.675 IC9.6
NetC7_1: C7.1 IC1.8 Y1.1 | length 13.7
  Top Layer w0.2: Y1.1 51.15,11.7 50.75,12.1 50.75,13.633 50.867,13.75 53.75,13.75 54,13.5 54,10.5 54.5,10 55.054,10 55.181,10.127 56.902,10.127 57.025,10.25 IC1.8
  Top Layer w0.3: Y1.1 51.416,11.866 C7.1
NetC9_1: C9.1 IC1.9 Y1.3 | length 6.1
  Top Layer w0.3: C9.1 52.584,9.134 Y1.3 54.987,9.4 55.338,9.75 IC1.9
NetC26_1: C26.1 IC3.1 | length 2.4
  Top Layer w0.2: C26.1 14.267,3.437 15.35,2.355 15.35,1.687 IC3.1
NetC28_1: C28.1 IC2.1 L1.2
NetC28_2: C28.2 IC2.3 | length 1.6
  Top Layer w0.2: C28.2 32.334,16 IC2.3
NetC31_1: C31.1 IC5.1 | length 2.7
  Top Layer w0.3: C31.1 23.083,3.105 23.645,3.105 24,2.75 24,1.587 IC5.1
NetCON11_1: CON11.1 pad.2 Q9.5_8
NetD1_2: D1.2 R14.1 | length 4.1
  Top Layer w0.2: D1.2 34,9.45 34,11.75 34.584,12.334 R14.1
NetD1_3: D1.3 IC2.4 R8.1 | length 8.2
  Top Layer w0.2: R8.1 31.25,15.898 31.45,15.698 31.468,15.698 31.916,15.25 32.85,15.25 ; D1.3 33,12.075 33.2,12.275 33.775,12.275 34,12.5 34,14.75 33.75,15 33.1,15 32.85,15.25 ; IC2.4 33.1,15.5 32.85,15.25
NetIC2_5: IC2.5 R9.1 R13.2 | length 2.6
  Top Layer w0.2: R13.2 R9.1 36.5,15.25 36.3,15.45 35.75,15.45 IC2.5
NetIC3_14: IC3.14 R16.1 | length 1.2
  Top Layer w0.3: IC3.14 R16.1@16.775,8.658
NetIC3_16: IC3.16 R2.1 | length 1.4
  Top Layer w0.2: R2.1@15.297,8.666 R2.1 ; IC3.16 R2.1@15.475,8.666
NetIC4_3: IC4.3 Q3.1 Q3.2 Q3.3 Q4.1 Q4.2 Q4.3 R20.2 | length 8.1
  Top Layer w0.2: R20.2 13.3,11.9 13.95,11.25 16.552,11.25 v1(17.98,9.823)
  Bottom Layer w0.2: v1(17.98,9.823) 18.018,9.861 18.018,10.018 18.7,10.7 IC4.3
NetIC5_14: IC5.14 R21.1 | length 1.1
  Top Layer w0.2: IC5.14 R21.1@25.275,8.539
NetIC5_16: IC5.16 R18.1 | length 1.2
  Top Layer w0.3: IC5.16 R18.1@23.975,8.607
NetIC6_3: IC6.3 Q7.1 Q7.2 Q7.3 Q8.1 Q8.2 Q8.3 R31.2 | length 6.7
  Top Layer w0.3: R31.2 22.8,11.9 23.431,11.269 23.481,11.269 v2(23.5,11.25)
  Bottom Layer w0.3: v2(23.5,11.25) 27,11.25 27.2,11.05 IC6.3
NetLED1_1: LED1.1 R22.1 | length 1.7
  Bottom Layer w0.3: LED1.1 28.724,22.276 28.724,21.776 28.965,21.535 28.965,21.119 R22.1
NetLED2_1: LED2.1 R23.1 | length 1.8
  Bottom Layer w0.3: LED2.1 31.525,22.5 32.084,21.941 R23.1
NetLED3_1: LED3.1 R24.1 | length 1.8
  Bottom Layer w0.2: LED3.1 41.775,22.5 42.334,21.941 R24.1
NetLED4_1: LED4.1 R25.1 | length 1.8
  Bottom Layer w0.3: R25.1 60.433,20.75 61,21.317 LED4.1
"Power EN": IC1.38 R14.2 | length 38.2
  Top Layer w0.2: R14.2 35.691,10.975 49.083,10.975 49.227,11.119 49.227,12.577 50.25,13.6 v1(50.25,14.25) ; IC1.38 v1(63,15.9)
  Bottom Layer w0.2: v1(50.25,14.25) 50.25,15.688 50.382,15.82 50.382,18.507 51.904,20.029 55.174,20.029 59.318,15.885 62.985,15.885 v1(63,15.9)
"PWM A1": IC1.30 IC3.3 | length 59.3
  Top Layer w0.2: IC1.30 66.458,10.75 66.571,10.637 v1(66.625,10.637)
  Top Layer w0.3: IC3.3 16.85,1.637 16.85,2.425 17.075,2.65 18.5,2.65 19.35,3.5 v1(20.05,3.5)
  Bottom Layer w0.2: v1(20.05,3.5) 32.084,3.5 32.244,3.34 62.978,3.34 66.533,6.895 66.533,7.388 67.194,8.049 67.194,10.068 v1(66.625,10.637)
"PWM A2": IC1.31 IC3.6 | length 58.5
  Top Layer w0.2: IC3.6 18.85,1.687 18.85,2.321 19.413,2.884 20.037,2.884 v1(20.075,2.845) ; IC1.31 64.227,11.223 67.122,11.223 v1(67.15,11.195)
  Bottom Layer w0.2: v1(20.075,2.845) 30.673,2.845 30.734,2.907 52.14,2.907 52.142,2.904 63.004,2.904 66.86,6.76 66.86,7.252 67.521,7.913 67.521,10.824 v1(67.15,11.195)
"PWM B1": IC1.28 IC5.3 | length 48.2
  Top Layer w0.2: IC5.3 25.35,1.637 25.35,2.341 29.009,6 30.755,6 31.853,4.902 32.35,4.902 v1(32.353,4.898) ; IC1.28 64.228,9.723 65.072,9.723 v1(65.1,9.695)
  Bottom Layer w0.2: v1(32.353,4.898) 32.392,4.86 32.757,4.86 33.291,4.326 58.149,4.326 58.154,4.321 62.571,4.321 65.552,7.302 65.552,8.092 65.825,8.365 65.825,8.917 65.1,9.642 v1(65.1,9.695)
"PWM B2": IC1.29 IC5.6 | length 46.4
  Top Layer w0.2: IC5.6 27.35,1.687 27.35,2.341 29.25,4.241 v1(32.591,4.241) ; IC1.29 65.521,10.25 65.596,10.175 v1(65.65,10.175)
  Bottom Layer w0.2: v1(32.591,4.241) 32.645,4.241 32.887,3.999 58.014,3.999 58.019,3.994 62.707,3.994 65.879,7.166 65.879,7.659 66.152,7.932 66.152,9.052 66.084,9.12 66.084,9.741 v1(65.65,10.175)
RESET: CON3.1 IC1.10 J1.11 | length 49.8
  Top Layer w0.2: v1(51.475,17.375) 51.518,17.375 51.891,17.749 56.199,17.749 58.4,19.95 CON3.1 59,21.306 59.794,22.1 62.723,22.1 65.802,19.021 70.404,19.021 71.633,20.25 82.121,20.25 82.7,19.671 82.7,19.05 J1.11
  Top Layer w0.3: v1(56.175,9.025) 56.202,9.025 56.427,9.25 IC1.10
  Bottom Layer w0.3: v1(51.475,17.375) 51.475,15.251 51.651,15.075 54.349,15.075 54.525,14.899 54.525,10.675 v1(56.175,9.025)
SCL: AC1.13 IC1.22 R5.1 | length 31.9
  Top Layer w0.2: IC1.22 62.55,7.5 62.55,7.104 63.31,6.344 68.509,6.344 72.25,10.085 v2(72.25,10.75) ; v2(71.75,19.004) 72.496,19.004 72.61,18.89 73.918,18.89 73.997,18.81 75.711,18.81 76.266,19.365 76.84,19.365 R5.1 ; AC1.13 73.8,15.9 73.529,15.9 73.323,16.106 73.323,16.677 72.25,17.75 v2(71.75,17.75) 71.75,17.641 71.75,15.25 v2(74.5,12.5)
  Bottom Layer w0.2: v2(71.75,17.75) v2(71.75,19.004) ; v2(72.25,10.75) 74,12.5 v2(74.5,12.5)
SDA: AC1.14 IC1.23 R11.1 | length 35.7
  Top Layer w0.2: IC1.23 63.05,7.5 63.05,7.104 63.483,6.671 68.373,6.671 71.5,9.798 v2(71.5,11.25) ; AC1.14 73.8,15.3 73.367,15.3 73.25,15.183 73.25,14.29 73.367,14.173 78.673,14.173 v2(79.5,15) 79.5,16.777 78.21,18.066 R11.1@78.002,18.275 ; 79.5,16.759 78.202,18.058 78.202,18.075 R11.1@78.002,18.275 ; R11.1@78.002,18.275 R11.1 R11.1@78.002,18.275
  Bottom Layer w0.2: v2(71.5,11.25) 73.204,12.954 75.296,12.954 75.329,12.921 77.421,12.921 v2(79.5,15)
"Servo PWM": CON2.2 IC1.37 | length 11.1
  Top Layer w0.2: IC1.37 v1(63.5,15.5) ; v1(68.5,16.5) v1(68.5,17.75)
  Bottom Layer w0.2: v1(63.5,15.5) 67.5,15.5 v1(68.5,16.5) ; v1(68.5,17.75) 69,17.75 69.25,18 v1(69.25,20.5)
Start: IC1.2 J1.4 | length 48
  Top Layer w0.2: v1(55.575,16.575) 58.819,16.575 v1(59.188,16.944) ; v1(55.948,14.501) 55.91,14.462 55.91,14.05 55.905,14.045 55.905,13.845 56.45,13.3 57.25,13.3 IC1.2 ; v1(65.5,16.119) 67.006,16.119 v1(69.75,13.375) ; v1(79.5,8.225) 80.075,8.225 83.152,11.302 83.152,13.94 86.25,17.038 J1.4
  Bottom Layer w0.2: v1(55.575,16.575) 56.173,15.977 56.173,15.388 55.904,15.119 55.904,14.954 55.91,14.948 55.91,14.539 v1(55.948,14.501) ; v1(59.188,16.944) 60.84,16.944 60.992,17.096 62.589,17.096 63.566,16.119 v1(65.5,16.119) ; v1(69.75,13.375) 69.75,10.75 72.275,8.225 v1(79.5,8.225)
"Start Mod": IC1.1 J1.3 | length 53.7
  Top Layer w0.2: v1(56.603,14.492) 56.603,13.917 56.72,13.8 57.25,13.8 IC1.1 ; v1(56.825,15.975) 50.725,15.975 49.925,16.775 49.925,18.075 50.442,18.592 55.108,18.592 55.433,18.917 55.433,19.113 58.796,22.477 64.019,22.477 66.042,24.5 81.942,24.5 86.75,19.692 J1.3
  Bottom Layer w0.2: v1(56.603,14.492) 56.603,14.546 56.825,14.768 v1(56.825,15.975)
SWCLK: CON3.4 IC1.36 J1.9 | length 30.3
  Top Layer w0.2: CON3.4 62,19.45 64.2,17.25 IC1.36 ; v1(66,19.5) 70.421,19.5 71.498,20.577 82.865,20.577 83.75,19.692 J1.9
  Bottom Layer w0.2: v1(62.05,19.475) 62.062,19.487 65.988,19.487 v1(66,19.5)
SWDIO: CON3.2 IC1.35 J1.10 | length 34.6
  Top Layer w0.2: CON3.2 60,20.45 60.527,20.977 62.394,20.977 64.852,18.519 64.852,13.277 64.825,13.25 ; IC1.35 64.825,13.25 ; v1(65.85,13.6) 65.843,13.6 65.493,13.25 64.825,13.25 ; v1(82.75,16.25) 83.25,16.75 J1.10
  Bottom Layer w0.2: v1(65.85,13.6) 66.507,14.257 77.757,14.257 79.75,16.25 v1(82.75,16.25)
"Switch 1": IC1.3 J1.5 | length 49.6
  Top Layer w0.2: v1(54.525,16.8) 54.5,16.825 54.5,17.133 54.617,17.25 57.823,17.25 58.01,17.437 58.175,17.437 58.303,17.309 58.571,17.309 v1(58.61,17.271) ; v1(55.25,14.5) 55.25,14 56.45,12.8 57.25,12.8 IC1.3 ; v1(65.5,16.75) 67.125,16.75 v1(70.5,13.375) ; v1(79.4,8.9) 80.21,8.9 82.825,11.515 82.825,14.075 85.75,17 J1.5
  Bottom Layer w0.2: v1(54.525,16.8) 54.525,15.96 55.385,15.1 55.385,14.9 55.288,14.803 55.288,14.538 v1(55.25,14.5) ; v1(58.61,17.271) 58.648,17.309 58.876,17.309 58.99,17.423 62.724,17.423 63.422,16.725 65.475,16.725 v1(65.5,16.75) ; v1(70.5,13.375) 70.5,10.75 72.35,8.9 v1(79.4,8.9)
"Switch 2": IC1.34 J1.6 | length 28.8
  Top Layer w0.2: IC1.34 73.282,12.75 76.479,9.553 79.452,9.553 80.078,9.553 82.498,11.973 82.498,14.21 85.25,16.962 J1.6
"USART 1 RX": CON4.3 IC1.46 | length 17
  Top Layer w0.2: CON4.3 46,20.75 46.527,20.223 46.635,20.223 49.227,17.631 49.227,16.548 50.682,15.093 57.19,15.093 57.199,15.102 58.744,15.102 58.95,14.896 58.95,14.5 IC1.46
"USART 1 TX": CON4.4 IC1.45 | length 17
  Top Layer w0.2: CON4.4 47,20.75 49.554,18.196 49.554,16.683 50.817,15.42 57.055,15.42 57.064,15.429 59.374,15.429 59.5,15.303 IC1.45
"USART 2 RX": CON5.3 IC1.14 | length 19.2
  Top Layer w0.2: CON5.3 53.6,19.036 53.717,18.919 54.596,18.919 54.824,19.147 v1(54.878,19.147) ; v1(58.31,6.699) 58.31,6.753 58.45,6.893 58.45,7.5 IC1.14
  Bottom Layer w0.2: v1(54.878,19.147) 54.916,19.109 55.369,19.109 55.478,19 55.741,19 58.675,16.066 58.675,7.064 v1(58.31,6.699)
"USART 2 TX": CON5.4 IC1.13 | length 17.3
  Top Layer w0.2: v1(54.155,19.474) 54.196,19.474 54.6,19.878 CON5.4 ; v1(57.65,7.4) 57.95,7.4 57.95,7.5 IC1.13
  Bottom Layer w0.2: v1(54.155,19.474) 54.193,19.436 54.193,18.857 54.95,18.1 56.178,18.1 58.225,16.053 58.225,7.825 58.084,7.684 57.988,7.684 57.704,7.4 v1(57.65,7.4)
V1A: C26.2 CON1.1 IC3.15 Q2.1 Q2.2 Q2.3 Q4.5_8 | length 18.6
  Top Layer w0.2: v1(11.7,17.8) 10.97,17.07 10.97,11.53 12.121,10.379 15.894,10.379 16.125,10.148 IC3.15 16,7.313 16,5.985 15.46,5.445 14.633,5.445 C26.2
  other v1: 12.55,17.8 13.15,17.8 12.55,18.3 13.15,18.3 12.55,18.8 13.15,18.8 12.55,19.3 13.15,19.3 12.575,19.9
V1B: C31.2 CON7.1 IC5.15 Q6.1 Q6.2 Q6.3 Q8.5_8 | length 20.3
  Top Layer w0.2: IC5.15 24.625,14.625 25.72,15.72 25.72,16.19 v2(25.75,16.22)
  Top Layer w0.3: C31.2 23.813,5.063 24.625,5.875 IC5.15
  Bottom Layer w0.2: v1(20.208,17.741) 20.3,17.649 20.3,16.2 20.65,15.85 23.6,15.85 23.97,16.22 v2(25.75,16.22)
  other v1: 19.775,17.785 19.775,18.215 20.195,18.25 20.25,18.75 19.775,18.783 18.85,19.2 20.232,19.233 19.775,19.35 20.072,19.772
VCC: C12.1 IC3.12 IC5.12 IC9.7 LED1.2 Q1.5_8 Q2.5_8 Q5.5_8 Q6.5_8 Q10.1 Q10.2 Q10.3 | length 39.1
  Top Layer w0.2: Q10.1 8.905,18.562 9.13,18.337 9.913,18.337 10.214,18.036 10.214,11.286 12.5,9 12.5,6.25 ; IC9.7 10.75,8.137 10.75,6.725 11.225,6.25 12.5,6.25 ; v2(15.4,6.27) 15.38,6.25 12.5,6.25 ; v2(18.05,4.919) 18.062,4.931 18.062,7.425 IC3.12 ; v1(25.5,5.25) 26.575,6.325 IC5.12
  Bottom Layer w0.2: v2(15.4,6.27) 15.4,6.252 16.627,5.025 v2@18.05,5.025 ; v2(18.05,4.919) v2@18.05,5.025 ; v1(25.5,5.25) 25.446,5.25 25.221,5.025 v2@18.05,5.025
  Bottom Layer w0.3: v1(26.2,23.95) 26.227,23.95 26.277,24 LED1.2
pads on no net: AC1.1 AC1.2 AC1.3 AC1.4 AC1.9 AC1.10 AC1.12 CON2.A CON2.B CON3.A CON3.B CON4.A CON4.B CON5.A CON5.B CON9.A CON9.B CON10.A CON10.B IC1.11 IC1.18 IC1.24 IC1.39 IC1.40 IC1.42 IC1.43 IC1.44 IC1.47 IC1.48 IC2.6 IC3.4 IC3.5 IC3.7 IC5.4 IC5.5 IC5.7 IC9.4 J1.MP1 J1.MP2

## Polygon pours and split planes (outlines as drawn)
GND on Top Layer "GND_L01_P022" (solid, pour order 22): 0,25 0,0 91,0 91,25
3.3V on Top Layer "3.3V_L01_P011" (solid, pour order 11): 42.5,15 42.25,14.75 42.25,14 42.75,13.5 43.75,13.5 44.25,13 49,13 49.5,13.5 49.5,15.25 49,15.75 44.25,15.75 43.75,15.25 42.75,15.25
NetIC4_3 on Top Layer "NETIC4_3_L01_P012" (solid, pour order 12): 11.25,16.75 11.25,14.25 12.25,13.25 12.25,11.25 12.5,11 15.054,11 15.054,14.054 16.75,15.75 16.75,16.75
"AHS B" on Top Layer "AHS_B_L01_P018" (solid, pour order 18): 22.5,20.2 22.5,18.3 22.4,18.2 22.155,17.955 22.155,17.535 22.4,17 23.6,17 23.7,16.9 24.9,16.9 25.5,17.5 25.5,18 25.3,18.2 25.3,18.5 25.2,18.6 25.2,19.5 25.1,19.6 24.5,19.6 24.4,19.7 24.4,20.2
NetIC6_3 on Top Layer "NETIC6_3_L01_P013" (solid, pour order 13): 18.75,16.5 18.75,16 19.5,15.25 20.5,15.25 21,14.75 21,11.5 21.5,11 23.75,11 24,11.25 24,15.5 24.25,15.75 24.25,16.5 24,16.75 19,16.75
V1B on Top Layer "V1B_L01_P007" (solid, pour order 7): 18.4,17.295 18.4,19.905 18.695,20.2 20.24,20.2 21.431,19.009 21.398,16.88 18.78,16.88
AHS on Top Layer "AHS_L01_P006" (solid, pour order 6): 14.6,17.112 14.6,20.139 16.748,20.139 17.1,19.687 17.1,17.112 16.62,17.112
+12 on Top Layer "+12_L01_P002" (solid, pour order 2): 9.25,17.25 10,16.5 10,11.5 9.75,11.25 1.75,11.25 1.25,11.75 1.25,16.75 1.75,17.25
5V on Top Layer "5V_L01_P010" (solid, pour order 10): 38.5,22.75 39,23.25 41,23.25 41.5,22.75 41.5,18.25 41,17.75 41,14.25 42,13.25 43.75,13.25 44,13 44,12.5 43.75,12.25 41.75,12.25 41,11.5 39.25,11.5 39,11.75 39,17.75 38.5,18.25
V1A on Top Layer "V1A_L01_P017" (solid, pour order 17): 11.2,20.2 13.2,20.2 13.2,19.25 13.9,19.25 13.9,18.17 14.105,17.965 14.105,17.505 13.725,17.327 13.873,17.327 13.725,17.327 13.725,17.12 11.275,17.12 11.275,17.327 11.085,17.535 10.895,17.535 10.895,17.995 11.2,18.3
VCC on Top Layer "VCC_L01_P000" (solid, pour order 0): 8.5,18 10.5,18 11,20.5 26.5,20.5 26.75,20.75 26.75,24.25 26.25,24.75 8.5,24.75 7.25,23.5 7.25,20.75 5.75,19.25 5.75,18.25 6,18
NetC28_1 on Top Layer "NETC28_1_L01_P009" (solid, pour order 9): 32.75,23 33,23.25 35.25,23.25 35.5,23 35.5,19.25 34.25,18 34.25,16.75 32,16.75 32,18.5 32.75,19.25
GND on Bottom Layer "GND_L02_P023" (solid, pour order 23): 0,25 0,0 91,0 91,25
GND on Bottom Layer "GND_L02_P019" (solid, pour order 19): 10.5,1.5 11,1 13,1 13.5,1.5 13.5,4 15,5.5 15,11 16,12 29.5,12 30,12.5 30,15 29.5,15.5 14,15.5 11.5,13 11.5,5.5 10.5,4.5
NetCON11_1 on Bottom Layer "NETCON11_1_L02_P004" (solid, pour order 4): 6.25,0.75 9.5,0.75 10,1.25 10,5.25 11,6.25 11,17 6.1,17 5.75,16.65 5.75,1.25
+12 on Bottom Layer "+12_L02_P003" (solid, pour order 3): 4.5,17.25 5,16.75 5,11.75 4.5,11.25 1.75,11.25 1.25,11.75 1.25,16.75 1.75,17.25

## Other copper
Bottom Layer:
  pour cut-out: 20.6,15.9 20.7,15.8 20.7,15.6 21.4,15.6 21.4,15.9
  pour cut-out: 13.1,15.9 13.1,15.4 13.8,15.4 13.8,15.9

## Silkscreen, mask and mechanical layers (free items; w line width, h text height)
Top Overlay:
  text "5V" at 43.627,18.873 h0.63 r270
  text "GND" at 44.627,18.873 h0.63 r270
  text "RX" at 45.627,18.873 h0.63 r270
  text "TX" at 46.627,18.873 h0.63 r270
  text "5V" at 51.377,18.873 h0.63 r270
  text "GND" at 52.377,18.873 h0.63 r270
  text "RX" at 53.377,18.873 h0.63 r270
  text "TX" at 54.377,18.873 h0.63 r270
  text "RESET" at 58.627,18.873 h0.63 r270
  text "SWDIO" at 59.627,18.873 h0.63 r270
  text "GND" at 60.627,18.873 h0.63 r270
  text "SWCLK" at 61.627,18.873 h0.63 r270
  text "ROBOILO" at 37.5,4.281 h3
  text "SER" at 37.501,2.517 h2
  text "Maj 2024" at 47.25,1.102 h2
  text "revision 2.0" at 37.501,1.018 h2
Bottom Overlay:
  text "MP-" at 11.877,20.877 h0.8
  text "MP+" at 15.377,20.877 h0.8
  text "ML-" at 18.877,20.877 h0.8
  text "ML+" at 22.127,20.877 h0.8
  text "VCC" at 8.8,5.2 h1.2 r90
  text "GND" at 12.55,5.2 h1.2 r90